# Altium PCB BuckConverter.PcbDoc
Units mm, origin at the board's own origin, x right, y up, seen from the top; angles counter-clockwise.
Board outline 44 x 24.5 mm, 2 copper layers (Top Layer, Bottom Layer); 7 components, 5 nets, 23 pads, 21 vias.
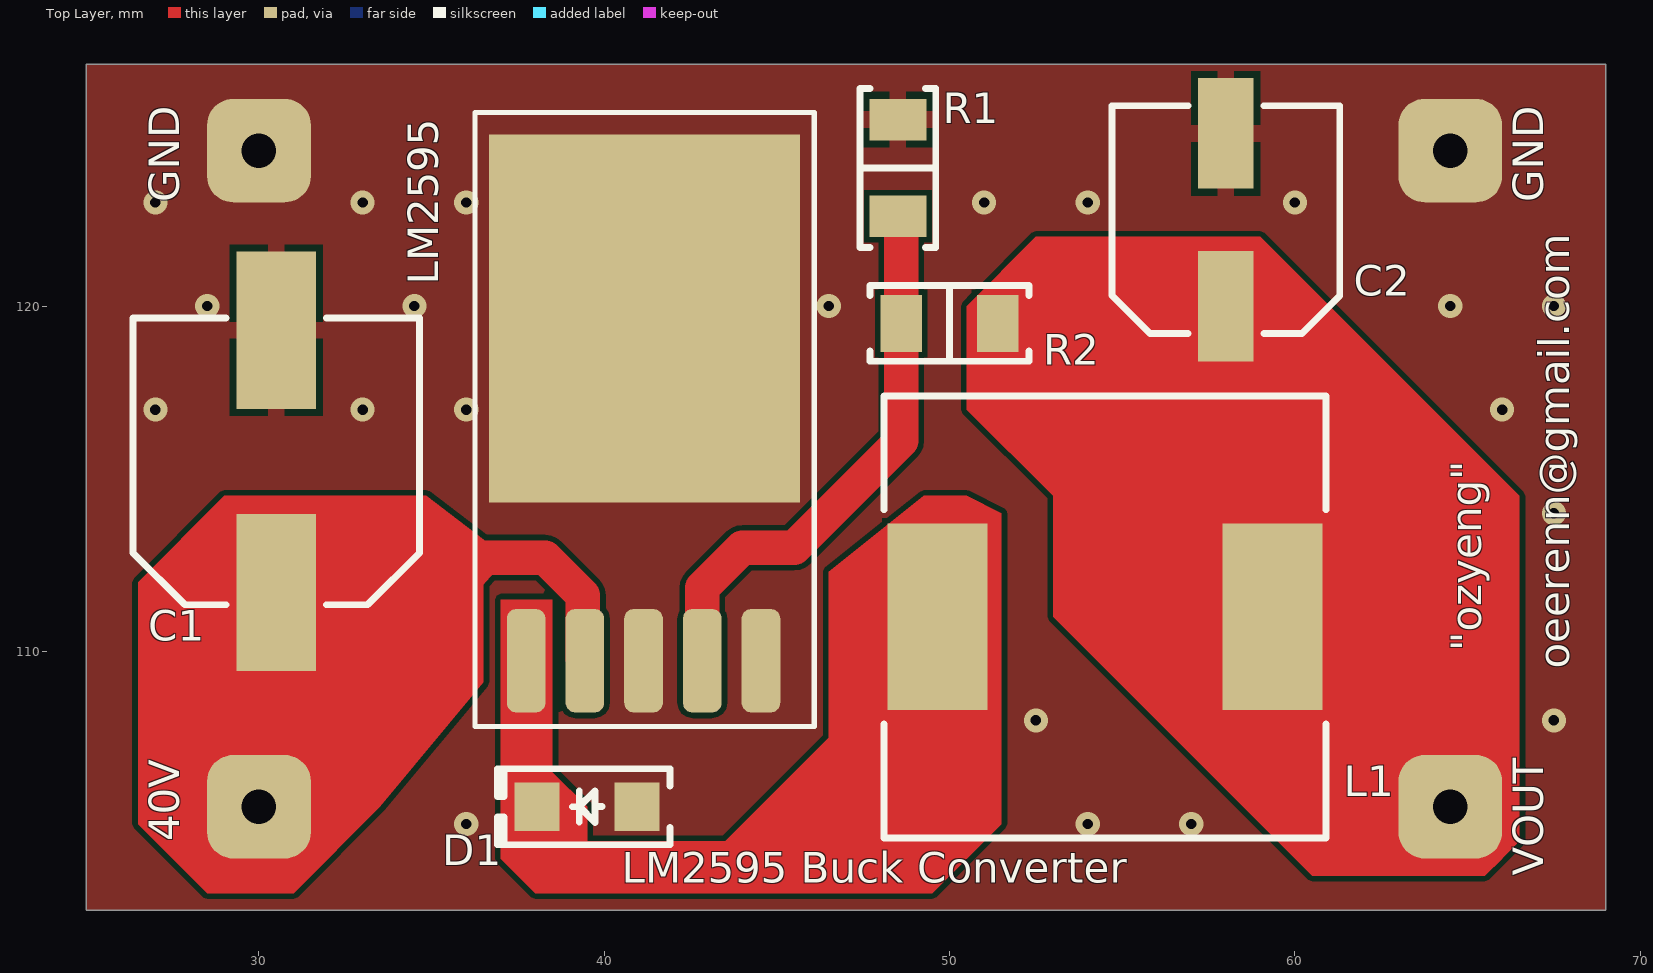
[diagram p0: Top Layer view]
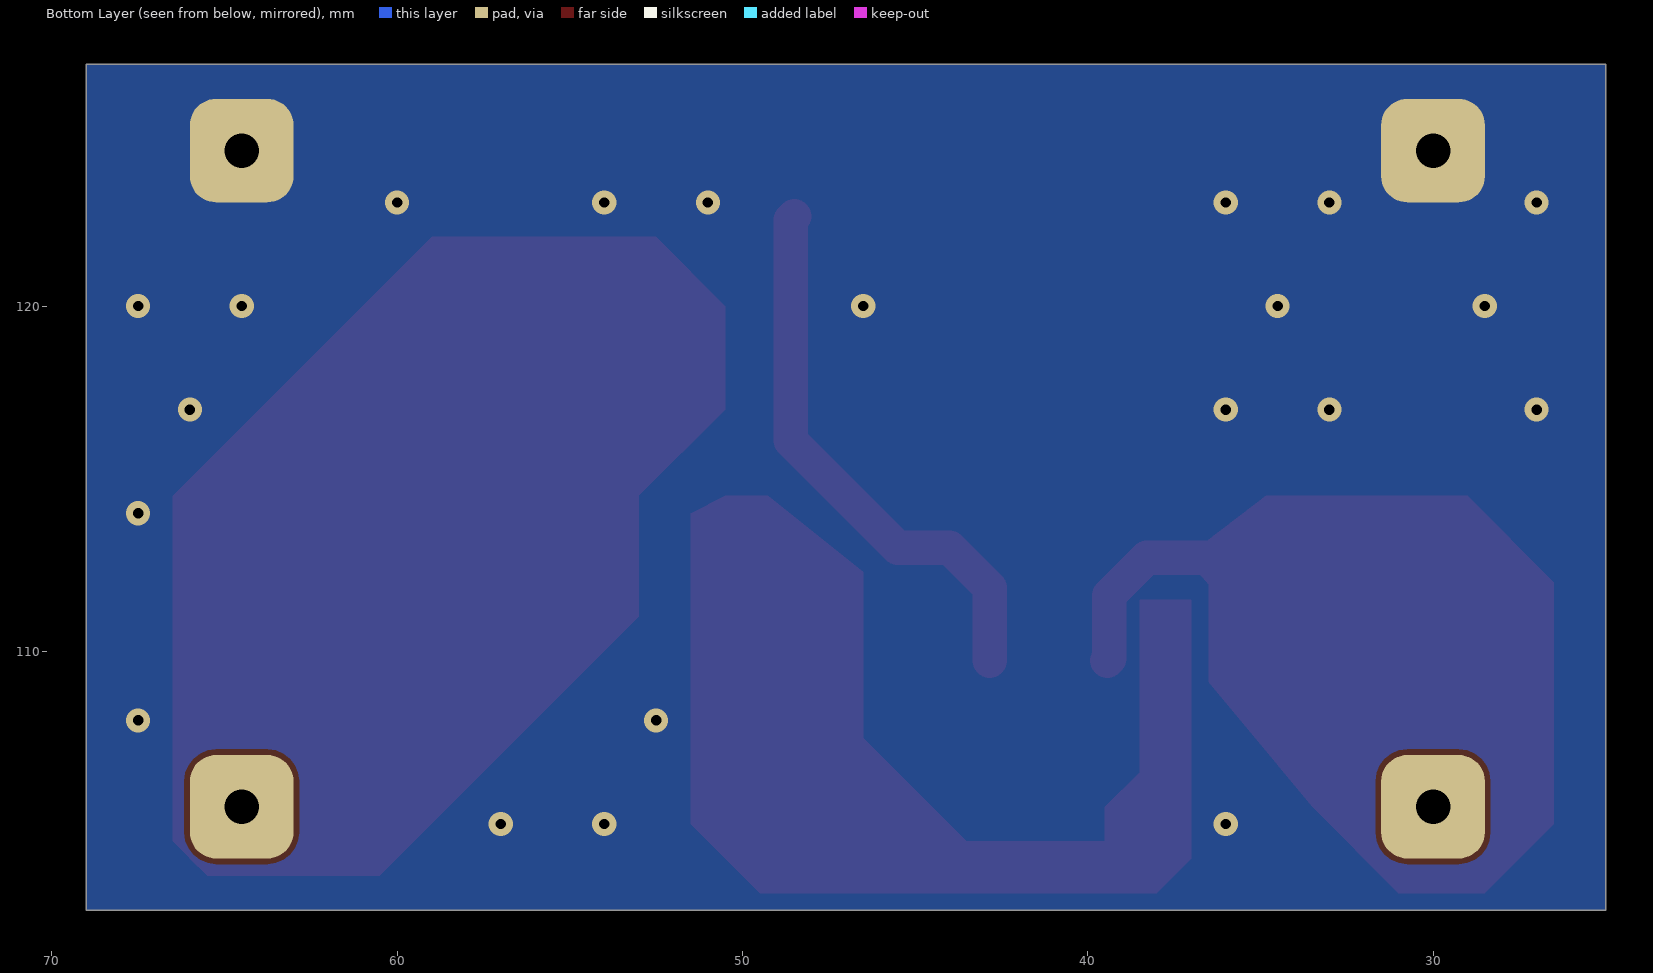
[diagram p1: Bottom Layer view, seen from below]
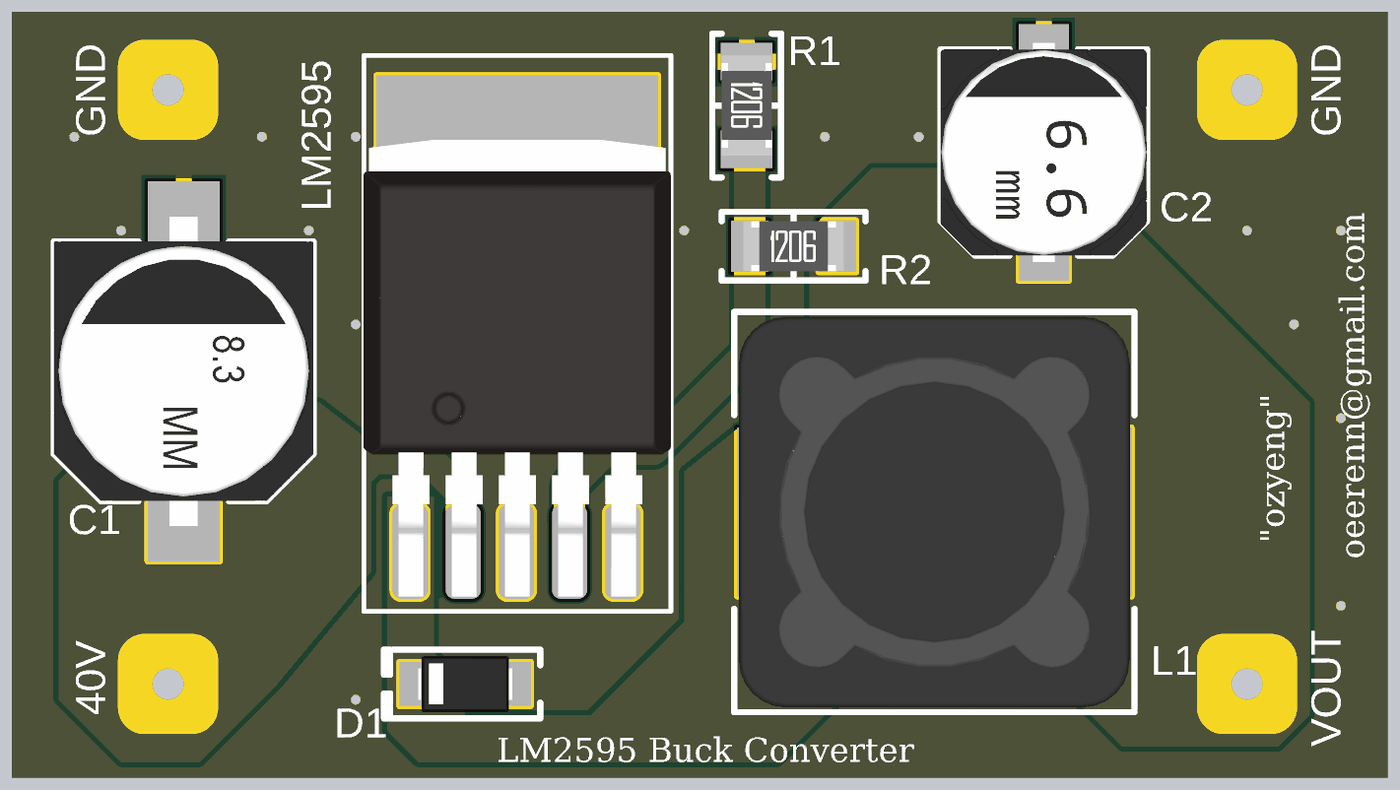
[diagram p2: 3D render of the assembled board from above, using the file's embedded part models]

## Layer stack, top to bottom
Top Solder: solder mask 0.0102, Solder Resist, Dk 3.5
Top Layer: signal copper 0.0356
Dielectric 1: dielectric 0.32, FR-4, Dk 4.8
Bottom Layer: signal copper 0.0356
Bottom Solder: solder mask 0.0102, Solder Resist, Dk 3.5

## Board outline
25,102.5 25,127 69,127 69,102.5

## Design rules (kind name [scope] priority, off if disabled: settings)
Clearance [All] p1: gap=0.152 ignorepadtopadclearanceinfootprint=FALSE
PolygonConnect [All] p1: thpad.connectstyle=Direct thpad.reliefconductorwidth=0.254 thpad.reliefentries=4 thpad.polygonreliefangle="90 Angle" thpad.airgapwidth=0.254 smdpad.connectstyle=Relief smdpad.reliefconductorwidth=0.5 smdpad.reliefentries=4 smdpad.polygonreliefangle="90 Angle" smdpad.airgapwidth=0.2 via.connectstyle=Direct via.reliefconductorwidth=0.254 via.reliefentries=4 via.polygonreliefangle="90 Angle" via.airgapwidth=0.254
RoutingVias [All] p1: holewidth=0.711 width=1.27 viastyle="Through Hole" minholewidth=0.711 minwidth=1.27 maxholewidth=0.711 maxwidth=1.27
SolderMaskExpansion [All] p1: expansion=0.102 istentingtop=FALSE
Width [All] p1: maxlimit=2 minlimit=0.152 preferedwidth=0.5
30 further rules are at their usual default settings.

## Components (designator, comment, footprint, x,y, rotation, side; value= is the part's Value field where it differs from the comment)
C1 "180µF" "CAP ALSMD 8.3MM H10.5MM" 30.5,115.5 r90 top
C2 "120µF" "CAP ALSMD 6.6MM H8.0MM" 58,122.5 r90 top
D1 "SS36L RVG" "SMF DO-219AB" 39.5,105.5 r180 top
L1 "100µH" "BOURNS SRR1280" 54.5,111 r0 top
LM2595 "LM2595" D2PAK 41.167,117.856 r0 top (schematic designator *)
R1 "1 kOhms" "RES 1206_3216" 48.5,124 r270 top
R2 "10 kOhms" "RES 1206_3216" 50,119.5 r0 top

## Footprints (in the part's own frame and the unit in brackets; to place one, negate y for a bottom-side part, rotate by r counter-clockwise, add the part's x,y. Pads: shape width x height; smd on the part's side, far side on the other; paste and mask are expansions set on the pad)
"BOURNS SRR1280" [mm] "Precision Wire Wound Inductor, 2-Leads, Body 12.50x12.50mm, IPC Medium Density"
  rect 2.9x5.4 smd: 1(-4.85,0) 2(4.85,0)
  silkscreen extent -6.4,-6.4 6.4,6.4, body extent -6.25,-6.25 6.25,6.25, height 7.9
"CAP ALSMD 6.6MM H8.0MM" [mm] "Aluminum Electrolytic Capacitor, Body 6.60x6.60x8.0mm, IPC Low Density"
  rect 3.2x1.6 smd: 1(-2.5,0) 2(2.5,0)
  silkscreen extent -3.3,-3.3 3.3,3.3, body extent -3.5,-3.3 3.5,3.3, height 8
"CAP ALSMD 8.3MM H10.5MM" [mm] "Aluminum Electrolytic Capacitor, Body 8.30x8.30x10.50mm, IPC Low Density"
  rect 4.55x2.3 smd: 1(-3.8,0) 2(3.8,0)
  silkscreen extent -4.15,-4.15 4.15,4.15, body extent -4.95,-4.15 4.95,4.15, height 10.5
D2PAK [mm]
  rrect50% 1.12x3 smd: 1(-3.429,-8.128) 1(-3.429,-8.128) 2(-1.729,-8.128) 3(-0.029,-8.128) 4(1.671,-8.128) 5(3.371,-8.128)
  rect 9x10.66 smd: 3(0,1.778)
  silkscreen extent -4.91,-10.03 4.91,7.75, body extent -4.91,-9.56 4.91,5.04, height 4.22
"RES 1206_3216" [mm] "Chip Resistor, 2-Leads, Body 3.13x1.55mm, IPC Medium Density"
  rect 1.2x1.65 smd: 1(-1.4,0) 2(1.4,0)
  silkscreen extent -2.3,-1.1 2.3,1.1, body extent -1.6,-0.8 1.6,0.8, height 0.6
"SMF DO-219AB" [mm] "Molded Diode, 2-Leads, Body 3.90x1.90mm, IPC Medium Density"
  rect 1.3x1.4 smd: 1(-1.45,0) 2(1.45,0)
  silkscreen extent -2.4,-1.1 2.59,1.1, body extent -1.5,-0.9 1.5,0.9, height 1.18

## Part data
C1: library part EEE-FK1H181SP, "CAP ALUM 180UF 20% 50V SMD", Device Package="Radial, Can - SMD", ESR (Equivalent Series Resistance)="340mOhm @ 100kHz", Lifetime @ Temp.="2000 Hrs @ 105°C", Manufacturer="Panasonic Electronic Components", Operating Temperature="-55°C ~ 105°C", Ratings=AEC-Q200, Ripple Current @ Low Frequency="227.5mA @ 120Hz", Supplier Part Number 1=P18966CT-ND, Tolerance=±20%, Voltage - Rated=50V, Applications=Automotive, Capacitance=180µF, ComponentLink1Description=Datasheet, ComponentLink1URL=https://b2b-api.panasonic.eu/file_stream/pids/fileversion/3102, ComponentLink2Description="DigiKey Link", ComponentLink2URL=http://digikey.com/product-detail/en/panasonic-electronic-components/EEE-FK1H181SP/P18966CT-ND/5805073, Height - Seated (Max)="0.413\" (10.50mm)", LastUpdated="2.09.2020 01:25:13", Lifecycle Status=Active, Minimum Order=1, Mounting Type="Surface Mount", Package / Case="Radial, Can - SMD", Packaging=TapeAndReel, Part Number=EEE-FK1H181SP, Part Status=Active, PartId=7743, Polarization=Polar, Price=0.32, Series=FKS, Size / Dimension="0.315\" Dia (8.00mm)", Supplier 1=DigiKey, Surface Mount Land Size="0.327\" L x 0.327\" W (8.30mm x 8.30mm)"
C2: library part EEE-FKV121XSP, "CAP ALUM 120UF 20% 35V SMD", Device Package="Radial, Can - SMD", ESR (Equivalent Series Resistance)="340mOhm @ 100kHz", Lifetime @ Temp.="2000 Hrs @ 105°C", Manufacturer="Panasonic Electronic Components", Operating Temperature="-55°C ~ 105°C", Ratings=AEC-Q200, Ripple Current @ Low Frequency="182mA @ 120Hz", Supplier Part Number 1=P18961CT-ND, Tolerance=±20%, Voltage - Rated=35V, Applications=Automotive, Capacitance=120µF, ComponentLink1Description=Datasheet, ComponentLink1URL=https://b2b-api.panasonic.eu/file_stream/pids/fileversion/3102, ComponentLink2Description="DigiKey Link", ComponentLink2URL=http://digikey.com/product-detail/en/panasonic-electronic-components/EEE-FKV121XSP/P18961CT-ND/5805068, Height - Seated (Max)="0.315\" (8.00mm)", LastUpdated="2.09.2020 01:25:38", Lifecycle Status=Active, Minimum Order=1, Mounting Type="Surface Mount", Package / Case="Radial, Can - SMD", Packaging=TapeAndReel, Part Number=EEE-FKV121XSP, Part Status=Active, PartId=8391, Polarization=Polar, Price=0.20, Series=FKS, Size / Dimension="0.248\" Dia (6.30mm)", Supplier 1=DigiKey, Surface Mount Land Size="0.260\" L x 0.260\" W (6.60mm x 6.60mm)"
D1: "DIODE SCHOTTKY 60V 3A SUB SMA", Current - Average Rectified (Io)=3A, Current - Reverse Leakage @ Vr="500µA @ 60V", Manufacturer="Taiwan Semiconductor Corporation", Operating Temperature - Junction="-55°C ~ 150°C", Package / Case=DO-219AB, Supplier Device Package="Sub SMA", Supplier Part Number 1=SS36LRVGCT-ND, Voltage - DC Reverse (Vr) (Max)=60V, Voltage - Forward (Vf) (Max) @ If="750mV @ 3A", ComponentLink1Description=Datasheet, ComponentLink1URL=https://www.taiwansemi.com/products/datasheet/SS34L%20SERIES_B14.pdf, ComponentLink2Description="DigiKey Link", ComponentLink2URL=http://digikey.com/product-detail/en/taiwan-semiconductor-corporation/SS36L-RVG/SS36LRVGCT-ND/7359628, Diode Type=Schottky, LastUpdated="2.09.2020 01:23:14", Lifecycle Status=Active, Minimum Order=1, Mounting Type="Surface Mount", Packaging=TapeAndReel, Part Number="SS36L RVG", Part Status=Active, PartId=1287, Price=0.11, Series=-, Speed="Fast Recovery =< 500ns, > 200mA (Io)", Supplier 1=DigiKey
L1: library part SRR1280-101M, "FIXED IND 100UH 2.1A 150MOHM SMD", Current - Saturation=2A, Current Rating (Amps)=2.1A, DC Resistance (DCR)="150mOhm Max", Device Package=Nonstandard, Frequency - Self Resonant=4.5MHz, Manufacturer="Bourns Inc.", Operating Temperature="-40°C ~ 125°C", Q @ Freq="18 @ 796kHz", Supplier Part Number 1=SRR1280-101MCT-ND, Tolerance=±20%, Inductance Frequency - Test=100kHz, ComponentLink1Description=Datasheet, ComponentLink1URL=https://www.bourns.com/docs/Product-Datasheets/SRR1280.pdf, ComponentLink2Description="DigiKey Link", ComponentLink2URL=http://digikey.com/product-detail/en/bourns-inc/SRR1280-101M/SRR1280-101MCT-ND/2127046, Height - Seated (Max)="0.315\" (8.00mm)", LastUpdated="2.09.2020 01:22:09", Lifecycle Status=Active, Material - Core=Ferrite, Minimum Order=1, Mounting Type="Surface Mount", Package / Case=Nonstandard, Packaging=TapeAndReel, Part Number=SRR1280-101M, Part Status=Active, PartId=24, Price=0.65, Series=SRR1280, Shielding=Shielded, Size / Dimension="0.492\" L x 0.492\" W (12.50mm x 12.50mm)", Supplier 1=DigiKey, Type=Wirewound, Inductance=100µH
R1: library part RNCP1206FTD1K00, "RES 1K OHM 1% 1/2W 1206", Device Package="1206 (3216 Metric)", Manufacturer="Stackpole Electronics Inc", Operating Temperature="-55°C ~ 155°C", Power (Watts)="0.5W, 1/2W", Supplier Device Package=1206, Supplier Part Number 1=RNCP1206FTD1K00CT-ND, Temperature Coefficient=±100ppm/°C, Tolerance=±1%, ComponentLink1Description=Datasheet, ComponentLink1URL=https://www.seielect.com/catalog/sei-rncp.pdf, ComponentLink2Description="DigiKey Link", ComponentLink2URL=http://digikey.com/product-detail/en/stackpole-electronics-inc/RNCP1206FTD1K00/RNCP1206FTD1K00CT-ND/2240675, Composition="Thin Film", Features="Anti-Sulfur, Moisture Resistant", Height - Seated (Max)="0.024\" (0.60mm)", LastUpdated="2.09.2020 01:13:10", Lifecycle Status=Active, Minimum Order=1, Number of Terminations=2, Package / Case="1206 (3216 Metric)", Packaging=TapeAndReel, Part Number=RNCP1206FTD1K00, Part Status=Active, PartId=26970, Price=0.01, Resistance="1 kOhms", Series=RNCP, Size / Dimension="0.122\" L x 0.059\" W (3.10mm x 1.50mm)", Supplier 1=DigiKey
R2: library part CRGCQ1206F10K, "CRGCQ 1206 10K 1%", Device Package="1206 (3216 Metric)", Manufacturer="TE Connectivity Passive Product", Operating Temperature="-55°C ~ 155°C", Power (Watts)="0.25W, 1/4W", Ratings=AEC-Q200, Supplier Device Package=1206, Supplier Part Number 1=A129822CT-ND, Temperature Coefficient=±100ppm/°C, Tolerance=±1%, ComponentLink1Description=Datasheet, ComponentLink1URL=https://www.te.com/commerce/DocumentDelivery/DDEController?Action=srchrtrv&DocNm=1773204-3&DocType=DS&DocLang=English, ComponentLink2Description="DigiKey Link", ComponentLink2URL=http://digikey.com/product-detail/en/te-connectivity-passive-product/CRGCQ1206F10K/A129822CT-ND/8577654, Composition="Thick Film", Features="Automotive AEC-Q200, Moisture Resistant", Height - Seated (Max)="0.026\" (0.65mm)", LastUpdated="2.09.2020 01:13:10", Lifecycle Status=Active, Minimum Order=1, Number of Terminations=2, Package / Case="1206 (3216 Metric)", Packaging=TapeAndReel, Part Number=CRGCQ1206F10K, Part Status=Active, PartId=27005, Price=0.01, Resistance="10 kOhms", Series=CRGCQ, Size / Dimension="0.122\" L x 0.061\" W (3.10mm x 1.55mm)", Supplier 1=DigiKey

## Free pads (board coordinates)
  rrect50% 3x3 hole 1: GND(30,124.5) GND(64.5,124.5) Vin(30,105.5) Vout(64.5,105.5)

## Via types
v1: diameter 0.7, hole 0.3, Top Layer to Bottom Layer, tented both sides, 21 vias

## Nets (pads, with @x,y where several pads share a name; then routed paths per layer and width w, separated by ;. In a path a pad name is that pad's centre, name@x,y a point inside that pad or via, vN(x,y) a via of type N, cw(c..) or ccw(c..) an arc to the next point about the centre after c; other vN are vias at no path point)
+12: C2.1 L1.2 pad.Vout R2.2 | length 1.5
  Top Layer w0.5: C2.1@57.5,119.5 C2.1 C2.1@58,119.2
GND: C1.2 C2.2 D1.1 LM2595.3 LM2595.5 pad.GND R1.1
  other v1: 36,105 54,105 57,105 52.5,108 67.5,108 67.5,114 27,117 33,117 36,117 66,117 28.5,120 34.5,120 46.5,120 64.5,120 67.5,120 27,123 33,123 36,123 51,123 54,123 60,123
Net*_1: D1.2 L1.1 LM2595.1
Net*_4: LM2595.4 R1.2 R2.1 | length 16.2
  Top Layer w1: LM2595.4 42.838,111.838 44,113 45.5,113 48.6,116.1 R2.1 48.6,122.5 R1.2
VCC: C1.1 LM2595.2 pad.Vin | length 11.8
  Top Layer w1: C1.1 30.5,111.85 31.15,112.5 33.1,112.5 33.312,112.712 38.288,112.712 39.378,111.622 39.378,109.788 LM2595.2

## Polygon pours and split planes (outlines as drawn)
GND on Bottom Layer "GND_L02_P001" (solid, pour order 1): 25,127 69,127 69,102.5 25,102.5
GND on Top Layer "GND_L01_P002" (solid, pour order 2): 25,127 69,127 69,102.5 25,102.5

## Other copper
Top Layer:
  rectangle net Net*_1: 37,104 38.5,111.5
  region net +12: 66,115 66.5,114.5 66.5,104.5 65.5,103.5 61.5,103.5 61.5,110 62,110.5
  region net Net*_1: 38.5,106.5 39.5,105.5 39.5,103.5 39,103.5 37.5,105 37.5,106.5
  region net Net*_1: 47.5,103 49.5,103 51.5,105 51.5,108 51,108 47,104
  region net Net*_1: 37,104.5 37,104 38,103 47.5,103 48.5,104
  region net Net*_1: 42,103 46.5,103 46.5,107.5
  region net VCC: 36.5,113.133 36.5,109.1 33.5,105.5 31,103 28.5,103
  region net VCC: 28.5,103 26.5,105 26.5,112 29,114.5 34.844,114.5 37.19,112.712
  region net Net*_1: 44.5,103 38.5,103 37,104.5 45.5,104.5
  region net Net*_1: 49.25,114.5 50.5,114.5 51.5,114 51.5,108 46.5,103 45.5,104 46.5,103 46.5,112.3
  region net +12: 50.5,120 52.5,122 59,122 66,115 66,104 65.5,103.5 60.5,103.5 53,111 53,114.5 50.5,117

## Silkscreen, mask and mechanical layers (free items; w line width, h text height)
Top Overlay:
  text "GND" at 27.983,123 h1.52 r90
  text "GND" at 67.483,123 h1.52 r90
  text "\"ozyeng\"" at 65.687,110 h1.52 r90
  text "oeerenn@gmail.com" at 68.239,109.5 h1.52 r90
  text "40V" at 27.983,104.5 h1.52 r90
  text "VOUT" at 67.483,103.501 h1.52 r90
  text "LM2595 Buck Converter" at 40.5,103.008 h1.52